# Altium PCB ShiftMux.PcbDoc
Units mm, origin at the board's own origin, x right, y up, seen from the top; angles counter-clockwise.
Board outline 106.5 x 89.5 mm, 2 copper layers (Top Layer, Bottom Layer); 13 components, 41 nets, 125 pads, 6 vias.
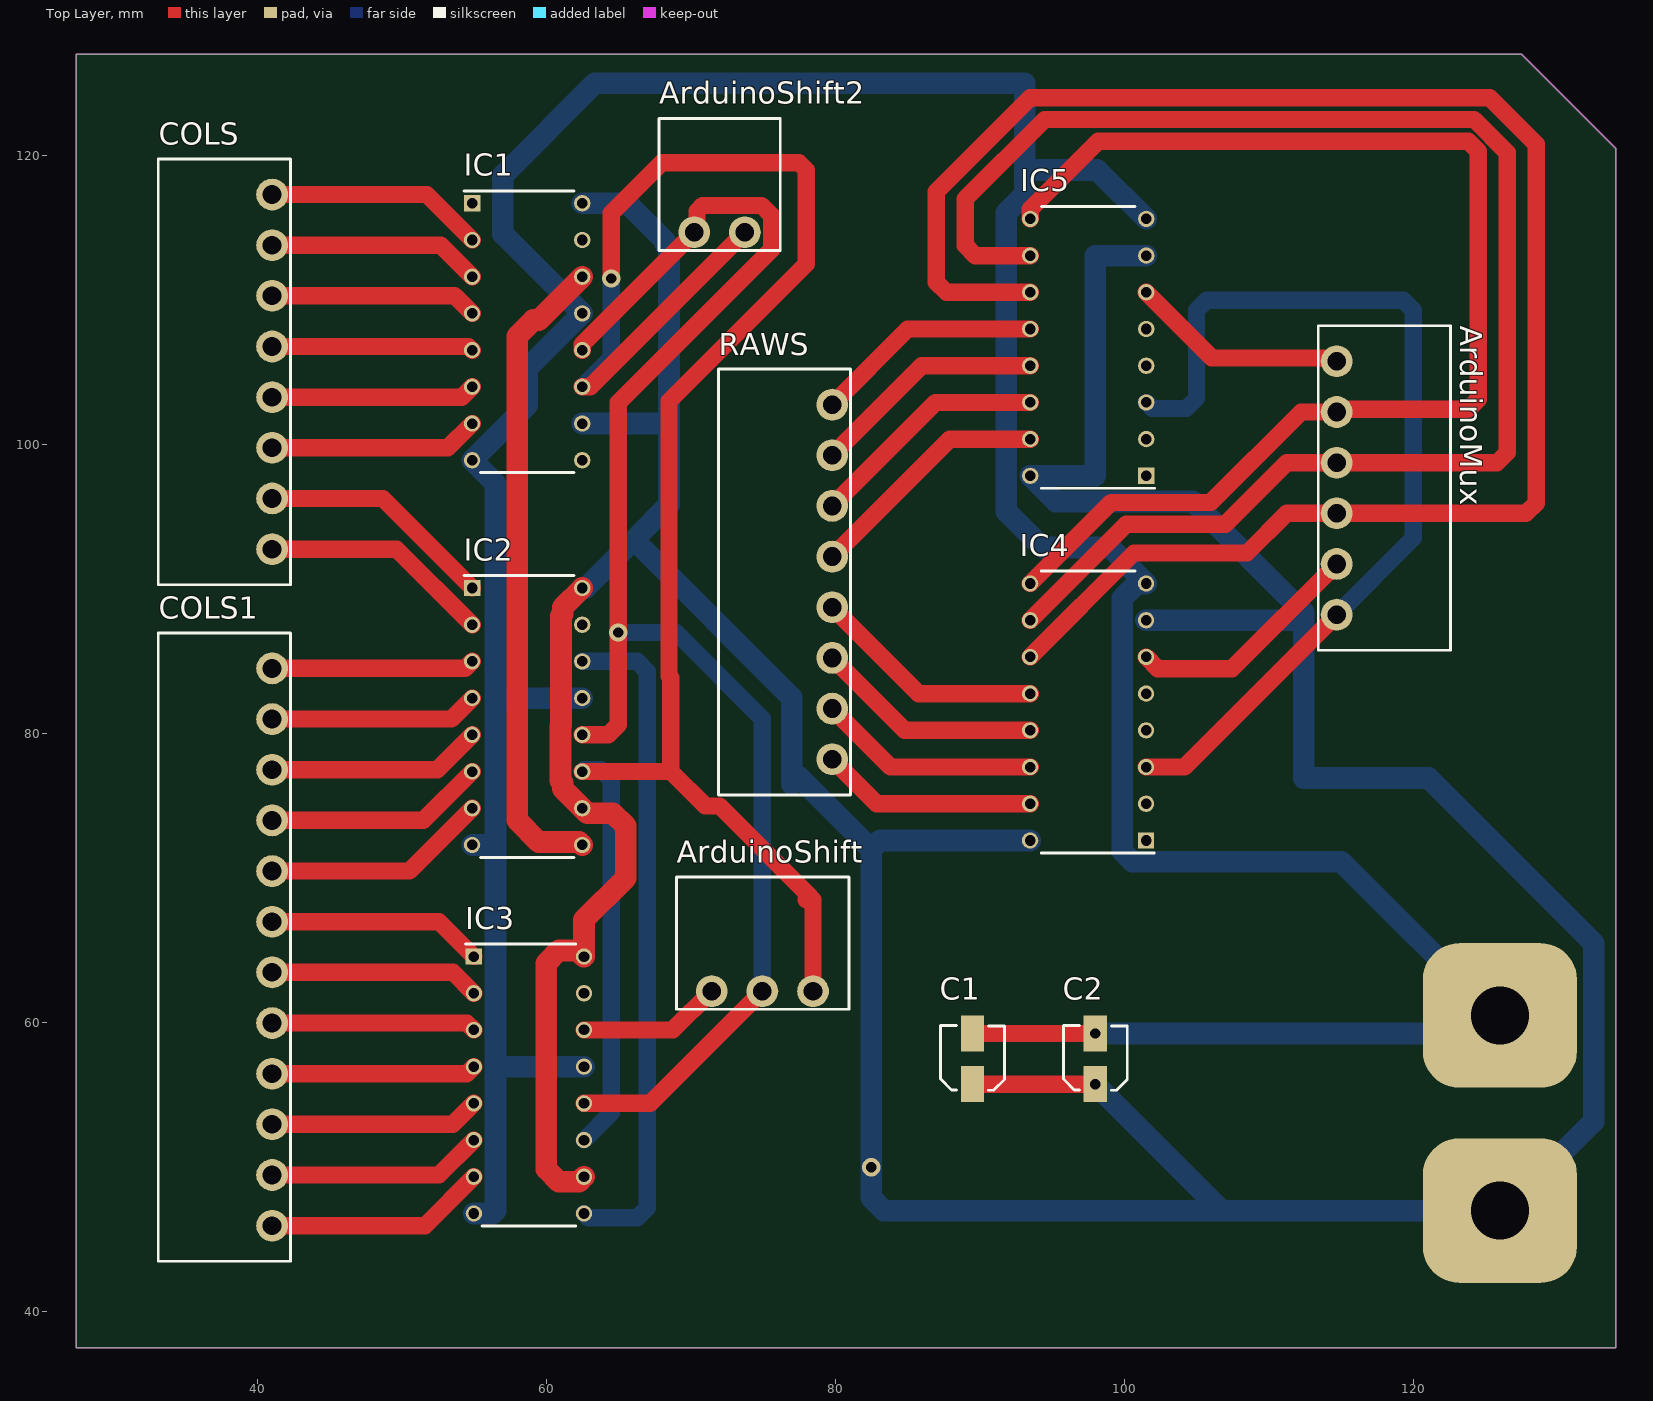
[diagram p0: Top Layer view]
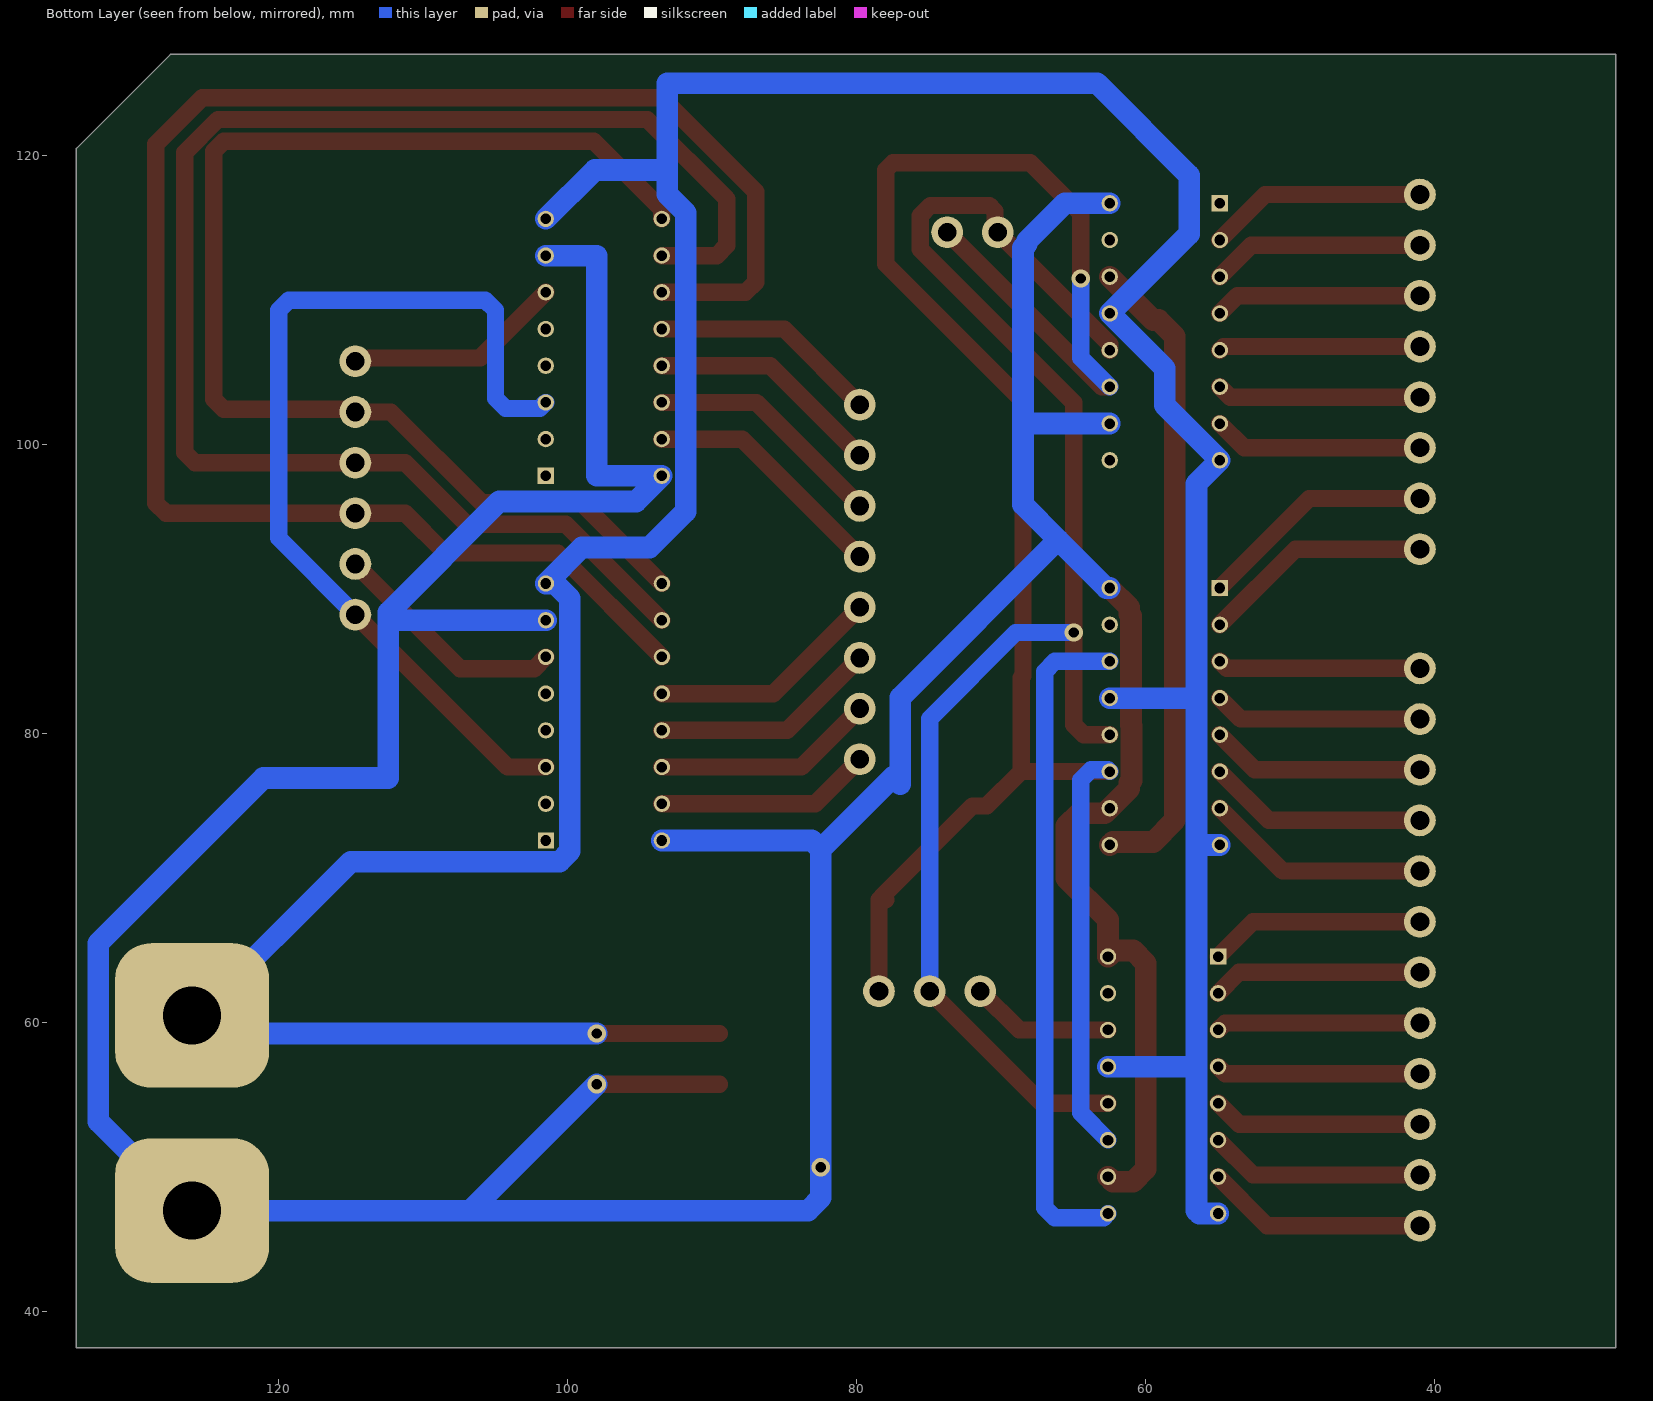
[diagram p1: Bottom Layer view, seen from below]
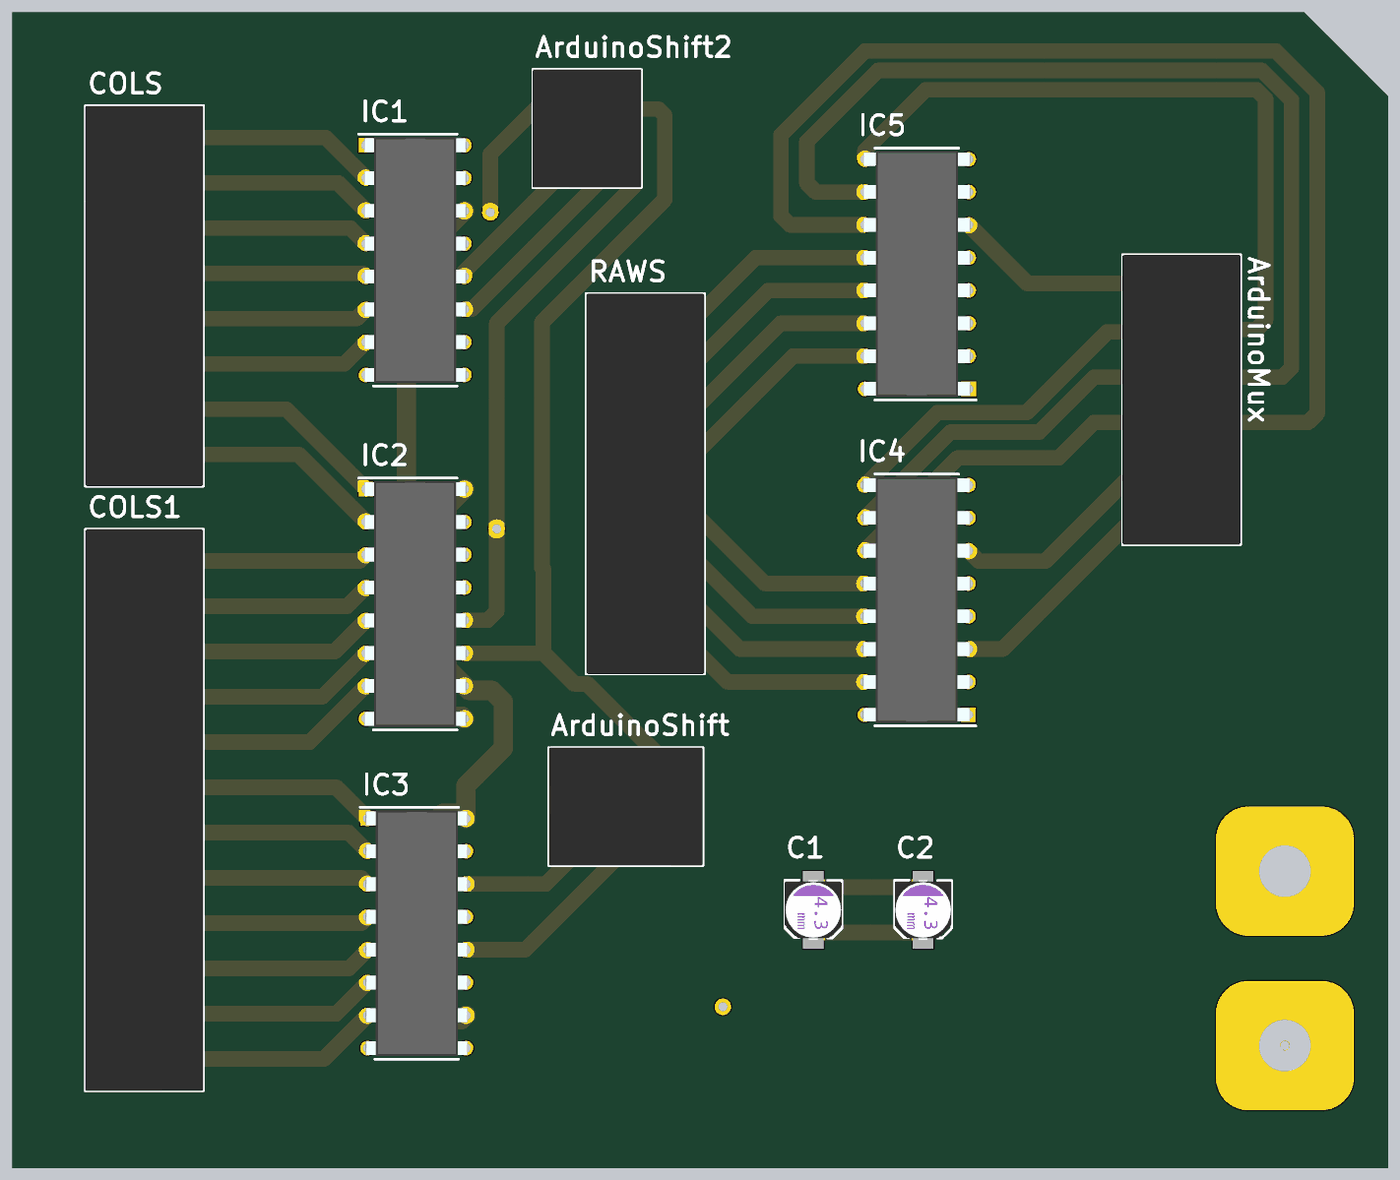
[diagram p2: 3D render of the assembled board from above, using the file's embedded part models]

## Layer stack, top to bottom
Top Solder: solder mask 0.0102, Solder Resist, Dk 3.5
Top Layer: signal copper 0.0356
Dielectric 1: dielectric 0.32, FR-4, Dk 4.8
Bottom Layer: signal copper 0.0356
Bottom Solder: solder mask 0.0102, Solder Resist, Dk 3.5

## Board outline
27.5,37.5 27.5,127 127.5,127 134,120.5 134,37.5

## Design rules (kind name [scope] priority, off if disabled: settings)
Clearance [All] p1: gap=0.152 ignorepadtopadclearanceinfootprint=FALSE
HoleSize [All] p1: absolutevalues=TRUE maxlimit=5 minlimit=0.025 maxpercent=80.000 minpercent=20.000
PolygonConnect [All] p1: connectstyle=Relief reliefconductorwidth=0.254 reliefentries=4 polygonreliefangle="90 Angle" airgapwidth=0.254
RoutingVias [All] p1: holewidth=0.711 width=1.27 viastyle="Through Hole" minholewidth=0.711 minwidth=1.27 maxholewidth=0.711 maxwidth=1.27
SolderMaskExpansion [All] p1: expansion=0.102
Width [All] p1: maxlimit=2 minlimit=0.152 preferedwidth=0.5
29 further rules are at their usual default settings.

## Classes and differential pairs
component class ShiftMux: ArduinoMux ArduinoShift ArduinoShift2 C1 C2 COLS COLS1 IC1 IC2 IC3 IC4 RAWS

## Components (designator, comment, footprint, x,y, rotation, side; value= is the part's Value field where it differs from the comment)
ArduinoMux "0395021006" "MOLEX 395021006" 118,97 r270 top
ArduinoShift "0395021003" "MOLEX 395021003" 75,65.5 r0 top
ArduinoShift2 "0395021002" "MOLEX 395021002" 72,118 r0 top
C1 "0.1µF" "CAP ALSMD POLY 4.3MM H5.5MM" 89.5,57.5 r90 top
C2 "0.1µF" "CAP ALSMD POLY 4.3MM H5.5MM" 98,57.5 r90 top
COLS "0395021008" "MOLEX 395021008" 37.737,105.039 r90 top
COLS1 "0395021012" "MOLEX 395021012" 37.737,65.237 r90 top
IC1 "74HC595N" DIP762W53P254L1902H420Q16N 58.69,107.81 r0 top
IC2 "74HC595N" DIP762W53P254L1902H420Q16N 58.69,81.19 r0 top
IC3 "74HC595N" DIP762W53P254L1902H420Q16N 58.81,55.69 r0 top
IC4 "74HC4051N,652" DIP802W53P254L1902H420Q16N 97.5,81.5 r180 top
IC5 "74HC4051N,652" DIP802W53P254L1902H420Q16N 97.512,106.73 r180 top
RAWS "0395021008" "MOLEX 395021008" 76.5,90.5 r90 top

## Footprints (in the part's own frame and the unit in brackets; to place one, negate y for a bottom-side part, rotate by r counter-clockwise, add the part's x,y. Pads: shape width x height; smd on the part's side, far side on the other; paste and mask are expansions set on the pad)
"CAP ALSMD POLY 4.3MM H5.5MM" [mm] "Aluminum Polymer Capacitor, Body 4.30x4.30x5.50mm, IPC Low Density"
  rect 2.5x1.6 smd: 1(-1.75,0) 2(1.75,0)
  silkscreen extent -2.17,-2.21 2.3,2.2, body extent -2.3,-2.2 2.3,2.2, height 5.5
DIP762W53P254L1902H420Q16N [mm]
  rect 1.13x1.13 hole 0.73: 1(-3.81,8.89)
  round 1.13 hole 0.73: 2(-3.81,6.35) 3(-3.81,3.81) 4(-3.81,1.27) 5(-3.81,-1.27) 6(-3.81,-3.81) 7(-3.81,-6.35) 8(-3.81,-8.89) 9(3.81,-8.89) 10(3.81,-6.35) 11(3.81,-3.81) 12(3.81,-1.27) 13(3.81,1.27) 14(3.81,3.81) 15(3.81,6.35) 16(3.81,8.89)
  silkscreen extent -4.38,-9.75 3.24,9.75, body extent -3.94,-9.51 3.94,9.51, height 4.2
DIP802W53P254L1902H420Q16N [mm]
  rect 1.13x1.13 hole 0.73: 1(-4.012,8.89)
  round 1.13 hole 0.73: 2(-4.012,6.35) 3(-4.012,3.81) 4(-4.012,1.27) 5(-4.012,-1.27) 6(-4.012,-3.81) 7(-4.012,-6.35) 8(-4.012,-8.89) 9(4.012,-8.89) 10(4.012,-6.35) 11(4.012,-3.81) 12(4.012,-1.27) 13(4.012,1.27) 14(4.012,3.81) 15(4.012,6.35) 16(4.012,8.89)
  silkscreen extent -4.58,-9.75 3.24,9.75, body extent -4.15,-9.51 4.15,9.51, height 4.2
"MOLEX 395021002" [mil] "2 Position Terminal Block Header, Male Pins, 3.5mm Pitch,4.2x9.2mm Body, 90°, Right Angle, THT"
  round 86.61 hole 51: 1(-69,-130) 2(69,-130)
  silkscreen extent -165,-180 165,180, body extent -166,-180 166,180, height 280
"MOLEX 395021003" [mm] "3 Position Terminal Block Header, Male Pins, 3.5mm Pitch,11.94mmx9.2mm Body, 90°, Right Angle, THT"
  round 2.2 hole 1.295: 1(-3.542,-3.315) 2(-0.036,-3.315) 3(3.469,-3.315)
  silkscreen extent -5.97,-4.57 5.97,4.57, body extent -5.97,-4.57 5.97,4.57, height 7.11
"MOLEX 395021006" [mil] "6 Position Terminal Block Header, Male Pins, 3.5mm Pitch,22.45mmx9.2mm Body, 90°, Right Angle, THT"
  round 86.61 hole 51: 1(-345,-130) 2(-207,-130) 3(-69,-130) 4(69,-130) 5(207,-130) 6(345,-130)
  silkscreen extent -442,-180 442,180, body extent -442,-180 442,180, height 280
"MOLEX 395021008" [mil] "8 Position Terminal Block Header, Male Pins, 3.5mm Pitch,29.46mmx9.2mm Body, 90°, Right Angle, THT"
  round 86.61 hole 51: 1(-483,-130) 2(-345,-130) 3(-207,-130) 4(-69,-130) 5(69,-130) 6(207,-130) 7(345,-130) 8(483,-130)
  silkscreen extent -580,-180 580,180, body extent -580,-180 580,180, height 280
"MOLEX 395021012" [mil] "12 Position Terminal Block Header, Male Pins, 3.5mm Pitch,43.485mmx9.2mm Body, 90°, Right Angle, THT"
  round 86.61 hole 51: 1(-759,-130) 2(-621,-130) 3(-483,-130) 4(-345,-130) 5(-207,-130) 6(-69,-130) 7(69,-130) 8(207,-130) 9(345,-130) 10(483,-130) 11(621,-130) 12(759,-130)
  silkscreen extent -856,-180 856,180, body extent -856,-180 856,180, height 280

## Part data
ArduinoMux: "TERM BLOCK HDR 6POS 90DEG 3.5MM", Color=Black, Current - UL=8A, Manufacturer=Molex, Operating Temperature="-40°C ~ 105°C", Supplier Part Number 1=WM7774-ND, Voltage - UL=300V, ComponentLink1Description=Datasheet, ComponentLink1URL=https://www.molex.com/pdm_docs/sd/395021002_sd.pdf, ComponentLink2Description="DigiKey Link", ComponentLink2URL=http://digikey.com/product-detail/en/molex/0395021006/WM7774-ND/1280625, Contact Mating Finish=Tin, Header Orientation="90°, Right Angle", LastUpdated="25.06.2020 15:45:17", Lifecycle Status=Active, Minimum Order=1, Mounting Type="Through Hole", Number of Levels=1, Number of Positions=6, Packaging=Bulk, Part Number=0395021006, Part Status=Active, Pitch="0.138\" (3.50mm)", Positions Per Level=6, Price=1.40, Series="Eurostyle ESE 39502", Supplier 1=DigiKey, Termination Style=Solder, Type="Header, Male Pins, Shrouded (4 Side)"
ArduinoShift: "TERM BLOCK HDR 3POS 90DEG 3.5MM", Color=Black, Current - UL=8A, Manufacturer=Molex, Operating Temperature="-40°C ~ 105°C", Supplier Part Number 1=WM7771-ND, Voltage - UL=300V, ComponentLink1Description=Datasheet, ComponentLink1URL=https://www.molex.com/pdm_docs/sd/395021002_sd.pdf, ComponentLink2Description="DigiKey Link", ComponentLink2URL=http://digikey.com/product-detail/en/molex/0395021003/WM7771-ND/1280622, Contact Mating Finish=Tin, Header Orientation="90°, Right Angle", LastUpdated="25.06.2020 15:44:18", Lifecycle Status=Active, Minimum Order=1, Mounting Type="Through Hole", Number of Levels=1, Number of Positions=3, Packaging=Tray, Part Number=0395021003, Part Status=Active, Pitch="0.138\" (3.50mm)", Positions Per Level=3, Price=0.78, Series="Eurostyle ESE 39502", Supplier 1=DigiKey, Termination Style=Solder, Type="Header, Male Pins, Shrouded (4 Side)"
ArduinoShift2: "TERM BLOCK HDR 2POS 90DEG 3.5MM", Color=Black, Current - UL=8A, Manufacturer=Molex, Operating Temperature="-40°C ~ 105°C", Supplier Part Number 1=WM7770-ND, Voltage - UL=300V, ComponentLink1Description=Datasheet, ComponentLink1URL=https://www.molex.com/pdm_docs/sd/395021002_sd.pdf, ComponentLink2Description="DigiKey Link", ComponentLink2URL=http://digikey.com/product-detail/en/molex/0395021002/WM7770-ND/1280621, Contact Mating Finish=Tin, Header Orientation="90°, Right Angle", LastUpdated="25.06.2020 15:44:05", Lifecycle Status=Active, Minimum Order=1, Mounting Type="Through Hole", Number of Levels=1, Number of Positions=2, Packaging=Tray, Part Number=0395021002, Part Status=Active, Pitch="0.138\" (3.50mm)", Positions Per Level=2, Price=0.58, Series="Eurostyle ESE 39502", Supplier 1=DigiKey, Termination Style=Solder, Type="Header, Male Pins, Shrouded (4 Side)"
C1 C2: library part EMVA630ADAR10MD55G, "CAP ALUM 0.1UF 20% 63V SMD", Device Package="Radial, Can - SMD", Lifetime @ Temp.="2000 Hrs @ 85°C", Manufacturer="United Chemi-Con", Operating Temperature="-40°C ~ 85°C", Ripple Current @ Low Frequency="1.3mA @ 120Hz", Supplier Part Number 1=565-2140-1-ND, Tolerance=±20%, Voltage - Rated=63V, Applications="General Purpose", Capacitance=0.1µF, ComponentLink1Description=Datasheet, ComponentLink1URL=//media.digikey.com/pdf/Data%20Sheets/United%20Chemi-Con%20PDFs/MVA_Series_Rev_Sep2009.pdf, ComponentLink2Description="DigiKey Link", ComponentLink2URL=http://digikey.com/product-detail/en/united-chemi-con/EMVA630ADAR10MD55G/565-2140-1-ND/757301, Height - Seated (Max)="0.205\" (5.20mm)", LastUpdated="2.09.2020 01:23:44", Lifecycle Status=Active, Minimum Order=1, Mounting Type="Surface Mount", Package / Case="Radial, Can - SMD", Packaging=TapeAndReel, Part Number=EMVA630ADAR10MD55G, Part Status=Active, PartId=7095, Polarization=Polar, Price=0.07, Series="Alchip™- MVA", Size / Dimension="0.157\" Dia (4.00mm)", Supplier 1=DigiKey, Surface Mount Land Size="0.169\" L x 0.169\" W (4.30mm x 4.30mm)"
COLS RAWS: "TERM BLOCK HDR 8POS 90DEG 3.5MM", Color=Black, Current - UL=8A, Manufacturer=Molex, Operating Temperature="-40°C ~ 105°C", Supplier Part Number 1=WM7776-ND, Voltage - UL=300V, ComponentLink1Description=Datasheet, ComponentLink1URL=https://www.molex.com/pdm_docs/sd/395021002_sd.pdf, ComponentLink2Description="DigiKey Link", ComponentLink2URL=http://digikey.com/product-detail/en/molex/0395021008/WM7776-ND/1280627, Contact Mating Finish=Tin, Header Orientation="90°, Right Angle", LastUpdated="25.06.2020 15:46:31", Lifecycle Status=Active, Minimum Order=1, Mounting Type="Through Hole", Number of Levels=1, Number of Positions=8, Packaging=Bulk, Part Number=0395021008, Part Status=Active, Pitch="0.138\" (3.50mm)", Positions Per Level=8, Price=1.97, Series="Eurostyle ESE 39502", Supplier 1=DigiKey, Termination Style=Solder, Type="Header, Male Pins, Shrouded (4 Side)"
COLS1: "TERM BLOCK HDR 12POS 90DEG 3.5MM", Color=Black, Current - UL=8A, Manufacturer=Molex, Operating Temperature="-40°C ~ 105°C", Supplier Part Number 1=WM7780-ND, Voltage - UL=300V, ComponentLink1Description=Datasheet, ComponentLink1URL=https://www.molex.com/pdm_docs/sd/395021002_sd.pdf, ComponentLink2Description="DigiKey Link", ComponentLink2URL=http://digikey.com/product-detail/en/molex/0395021012/WM7780-ND/1280631, Contact Mating Finish=Tin, Header Orientation="90°, Right Angle", LastUpdated="25.06.2020 15:47:47", Lifecycle Status=Active, Minimum Order=1, Mounting Type="Through Hole", Number of Levels=1, Number of Positions=12, Packaging=Bulk, Part Number=0395021012, Part Status=Active, Pitch="0.138\" (3.50mm)", Positions Per Level=12, Price=2.75, Series="Eurostyle ESE 39502", Supplier 1=DigiKey, Termination Style=Solder, Type="Header, Male Pins, Shrouded (4 Side)"
IC1 IC2 IC3: "Integrated Circuit", Manufacturer_Name=NXP, Datasheet Link=https://datasheet.datasheetarchive.com/originals/distributors/SFDatasheet-4/sf-00080087.pdf, Height=4.2mm, Manufacturer_Part_Number=74HC595N
IC4 IC5: "Integrated Circuit", Manufacturer_Name=Nexperia, Datasheet Link=http://media.digikey.com/pdf/Data%20Sheets/NXP%20PDFs/74HC(T)4051_Rev_Feb2017.pdf, Height=4.2mm, Manufacturer_Part_Number=74HC4051N,652

## Free pads (board coordinates)
  rrect50% 10.66x10 hole 4: GND(126,60.5) VCC(126,47)

## Via types
v1: diameter 1.27, hole 0.711, Top Layer to Bottom Layer, 6 vias

## Nets (pads, with @x,y where several pads share a name; then routed paths per layer and width w, separated by ;. In a path a pad name is that pad's centre, name@x,y a point inside that pad or via, vN(x,y) a via of type N, cw(c..) or ccw(c..) an arc to the next point about the centre after c; other vN are vias at no path point)
ArduinoA0: ArduinoMux.6 IC4.3 IC5.3 | length 66.4
  Top Layer w1.2: IC4.3 104.151,77.69 ArduinoMux.6
  Bottom Layer w1.2: IC5.3 101.944,102.5 104.297,102.5 105,103.203 105,109.297 105.703,110 119.297,110 120,109.297 120,93.539 ArduinoMux.6
ArduinoDP4: ArduinoMux.2 IC4.9 IC5.9 | length 87.4
  Top Layer w1.2: IC4.9 99.098,96 106,96 112.258,102.258 ArduinoMux.2 114.889,102.449 123.797,102.449 124.5,103.152 124.5,120.297 123.797,121 98.203,121 93.5,116.297 IC5.9
ArduinoDP5: ArduinoMux.3 IC4.10 IC5.10 | length 107.3
  Top Layer w1.2: IC4.10 100.138,94.5 107,94.5 111.253,98.753 ArduinoMux.3 125.797,98.753 126.5,99.456 126.5,120.209 124.209,122.5 94.5,122.5 89,117 89,113.783 89.703,113.08 IC5.10
ArduinoDP6: ArduinoMux.4 IC4.11 IC5.11 | length 122.8
  Top Layer w1.2: IC4.11 100.678,92.5 108.5,92.5 111.247,95.247 ArduinoMux.4 127.797,95.247 128.5,95.95 128.5,120.797 125.297,124 93.5,124 87,117.5 87,111.243 87.703,110.54 IC5.11
ArduinoDP7: ArduinoMux.5 IC4.6 | length 16.5
  Top Layer w1.2: IC4.6 102.322,84.5 107.456,84.5 ArduinoMux.5
ArduinoDP8: ArduinoShift2.1 ArduinoShift.2 IC1.12 IC2.12 IC3.12 | length 107.9
  Top Layer w1.2: IC2.12 64.297,79.92 65,80.623 v1(65,87) 65,102.912 75.605,113.517 75.605,115.847 74.902,116.55 70.845,116.55 70.439,116.143 70.439,115.099 70.142,114.803 ArduinoShift2.1 62.5,106.951 IC1.12 ; IC3.12 67.199,54.42 ArduinoShift.2
  Bottom Layer w1.2: v1(65,87) 69,87 74.964,81.036 ArduinoShift.2
ArduinoDP9: ArduinoMux.1 IC5.6 | length 15.2
  Top Layer w1.2: IC5.6 106.064,106 113.754,106 113.8,105.954 114.507,105.954 ArduinoMux.1
ArduinoDP11: ArduinoShift.1 IC3.14 | length 10
  Top Layer w1.2: IC3.14 68.774,59.5 ArduinoShift.1
ArduinoDP12: ArduinoShift2.2 ArduinoShift.3 IC1.11 IC2.11 IC3.11 | length 143.8
  Top Layer w1.2: IC2.11 68.62,77.38 ; IC1.11 63.055,104 ArduinoShift2.2 ; v1(64.5,111.5) 64.5,116 68,119.5 77.5,119.5 78,119 78,112.5 68.5,103 68.5,84 68.62,83.88 68.62,77.38 ; ArduinoShift.3 78.469,68.5 78,68.5 78.25,68.75 72,75 71,75 68.62,77.38
  Bottom Layer w1.2: IC2.11 62.62,77.5 63.797,77.5 64.5,76.797 64.5,53.76 IC3.11 ; IC1.11 64.5,106 v1(64.5,111.5)
COL1: COLS.8 IC1.2 | length 15.1
  Top Layer w1.2: COLS.8 51.733,117.307 IC1.2
COL2: COLS.7 IC1.3 | length 14.7
  Top Layer w1.2: COLS.7 52.698,113.802 IC1.3
COL3: COLS.6 IC1.4 | length 14.3
  Top Layer w1.2: COLS.6 53.664,110.296 IC1.4
COL4: COLS.5 IC1.5 | length 13.9
  Top Layer w1.2: COLS.5 54.629,106.791 IC1.5
COL5: COLS.4 IC1.6 | length 14.1
  Top Layer w1.2: COLS.4 54.166,103.286 IC1.6
COL6: COLS.3 IC1.7 | length 14.5
  Top Layer w1.2: COLS.3 53.201,99.781 IC1.7
COL7: COLS.2 IC2.1 | length 16.4
  Top Layer w1.2: COLS.2 48.684,96.276 IC2.1
COL8: COLS.1 IC2.2 | length 16
  Top Layer w1.2: COLS.1 49.65,92.77 IC2.2
COL9: COLS1.12 IC2.3 | length 14
  Top Layer w1.2: COLS1.12 54.395,84.515 IC2.3
COL10: COLS1.11 IC2.4 | length 14.4
  Top Layer w1.2: COLS1.11 53.43,81.01 IC2.4
COL11: COLS1.10 IC2.5 | length 14.8
  Top Layer w1.2: COLS1.10 52.465,77.505 IC2.5
COL12: COLS1.9 IC2.6 | length 15.2
  Top Layer w1.2: COLS1.9 51.5,74 IC2.6
COL13: COLS1.8 IC2.7 | length 15.6
  Top Layer w1.2: COLS1.8 50.535,70.495 IC2.7
COL14: COLS1.7 IC3.1 | length 15
  Top Layer w1.2: COLS1.7 52.591,66.989 IC3.1
COL15: COLS1.6 IC3.2 | length 14.6
  Top Layer w1.2: COLS1.6 53.556,63.484 IC3.2
COL16: COLS1.5 IC3.3 | length 14.2
  Top Layer w1.2: COLS1.5 54.521,59.979 IC3.3
COL17: COLS1.4 IC3.4 | length 14.2
  Top Layer w1.2: COLS1.4 54.514,56.474 IC3.4
COL18: COLS1.3 IC3.5 | length 14.6
  Top Layer w1.2: COLS1.3 53.549,52.969 IC3.5
COL19: COLS1.2 IC3.6 | length 15
  Top Layer w1.2: COLS1.2 52.583,49.463 IC3.6
COL20: COLS1.1 IC3.7 | length 15.4
  Top Layer w1.2: COLS1.1 51.618,45.958 IC3.7
GND: C1.2 C2.2 IC1.8 IC1.13 IC2.8 IC2.13 IC3.8 IC3.13 IC4.8 IC5.8 pad.GND | length 271.1
  Top Layer w1.2: C1.2 v1(98,59.25)
  Bottom Layer w1.5: IC2.8 56.3,72.3 56.5,72.5 ; IC3.8 56.3,46.8 56.5,47 56.5,57 ; IC2.13 56.54,82.46 56.5,82.5 ; IC3.13 56.54,56.96 56.5,57 ; v1(98,59.25) 124.75,59.25 pad.GND 125.67,60.5 115.027,71.143 100.573,71.143 99.86,71.856 99.86,89.371 100.879,90.39 IC4.8 99.018,92.884 94.342,92.884 91.848,95.379 91.848,116.043 93.121,117.316 93.121,119 ; IC5.8 98.144,119 93.121,119 ; 56.5,57 56.5,72.5 ; 56.5,72.5 56.5,82.5 ; 56.5,82.5 56.5,97.3 IC1.8 58.69,102.73 58.69,105.27 IC1.13 57,114.58 57,118.621 63.379,125 93.121,125 93.121,119
NetIC1_14: IC1.14 IC2.9 | length 44.9
  Top Layer w1.5: IC2.9 62.3,72.5 59.5,72.5 58,74 58,107.5 59.12,108.62 59.5,108.62 IC1.14
NetIC2_14: IC2.14 IC3.9 | length 46.7
  Bottom Layer w1.2: IC2.14 66.297,85 67,84.297 67,47.203 66.297,46.5 62.92,46.5 IC3.9
RAW1: IC4.15 RAWS.1 | length 15
  Top Layer w1.2: RAWS.1 82.884,75.15 IC4.15
RAW2: IC4.14 RAWS.2 | length 15.4
  Top Layer w1.2: RAWS.2 83.849,77.69 IC4.14
RAW3: IC4.13 RAWS.3 | length 15.8
  Top Layer w1.2: RAWS.3 84.814,80.23 IC4.13
RAW4: IC4.12 RAWS.4 | length 16.2
  Top Layer w1.2: RAWS.4 85.779,82.77 IC4.12
RAW5: IC5.15 RAWS.5 | length 17.1
  Top Layer w1.2: RAWS.5 87.929,100.38 IC5.15
RAW6: IC5.14 RAWS.6 | length 16.7
  Top Layer w1.2: RAWS.6 86.964,102.92 IC5.14
RAW7: IC5.13 RAWS.7 | length 16.3
  Top Layer w1.2: RAWS.7 85.999,105.46 IC5.13
RAW8: IC5.12 RAWS.8 | length 15.9
  Top Layer w1.2: RAWS.8 85.034,108 IC5.12
VCC: C1.1 C2.1 IC1.10 IC1.16 IC2.10 IC2.16 IC3.10 IC3.16 IC4.7 IC4.16 IC5.7 IC5.16 pad.VCC | length 334.8
  Top Layer w1.2: C1.1 v1(98,55.75) ; v1(126,47) pad.VCC@126.703,47.703
  Top Layer w1.5: IC2.16 61.152,88.732 61.152,88.267 61.033,88.148 61.033,80.577 60.998,80.542 60.998,76.758 61.152,76.604 61.152,76.188 IC2.10 62.84,74.5 64.621,74.5 65.5,73.621 65.5,70 62.62,67.12 IC3.16 62.2,65 60.879,65 60,64.121 60,49.879 60.879,49 62.28,49 IC3.10
  Bottom Layer w1.5: IC2.16 62.741,90.08 66.081,93.419 ; IC1.10 68.46,101.46 68.5,101.5 ; IC1.16 65.621,116.7 68.245,114.076 68.245,113.869 68.5,113.614 68.5,101.5 ; 77,76.5 77,82.5 66.081,93.419 ; 77.5,77 82.5,72 ; IC4.16 83.11,72.61 82.5,72 ; v1(98,55.75) 106.75,47 ; IC4.7 111.9,87.85 112.43,88.381 ; IC5.7 98,113.08 98,97.84 IC5.16 95.271,96.069 104.742,96.069 112.43,88.381 ; 66.081,93.419 68.5,95.839 68.5,101.5 ; 82.5,72 v1(82.5,50) 82.5,47.879 83.379,47 106.75,47 ; 106.75,47 v1(126,47) 126.33,47 132.5,53.17 132.5,65.5 121.068,76.932 112.43,76.932 112.43,88.381
pads on no net: IC1.1 IC1.9 IC1.15 IC2.15 IC3.15 IC4.1 IC4.2 IC4.4 IC4.5 IC5.1 IC5.2 IC5.4 IC5.5

## Keep-outs
Top Layer:
  the board outline again, w0.1